# Altium PCB Low Power Brushed Motor Controller.PcbDoc
Units mil, origin at the board's own origin, x right, y up, seen from the top; angles counter-clockwise.
Board outline 3149.61 x 1181.1 mil, 4 copper layers (Top Layer, GND, 12V_FUSED, Bottom Layer), stack 23.756 mil thick; 34 components, 18 nets, 80 pads, 200 vias.
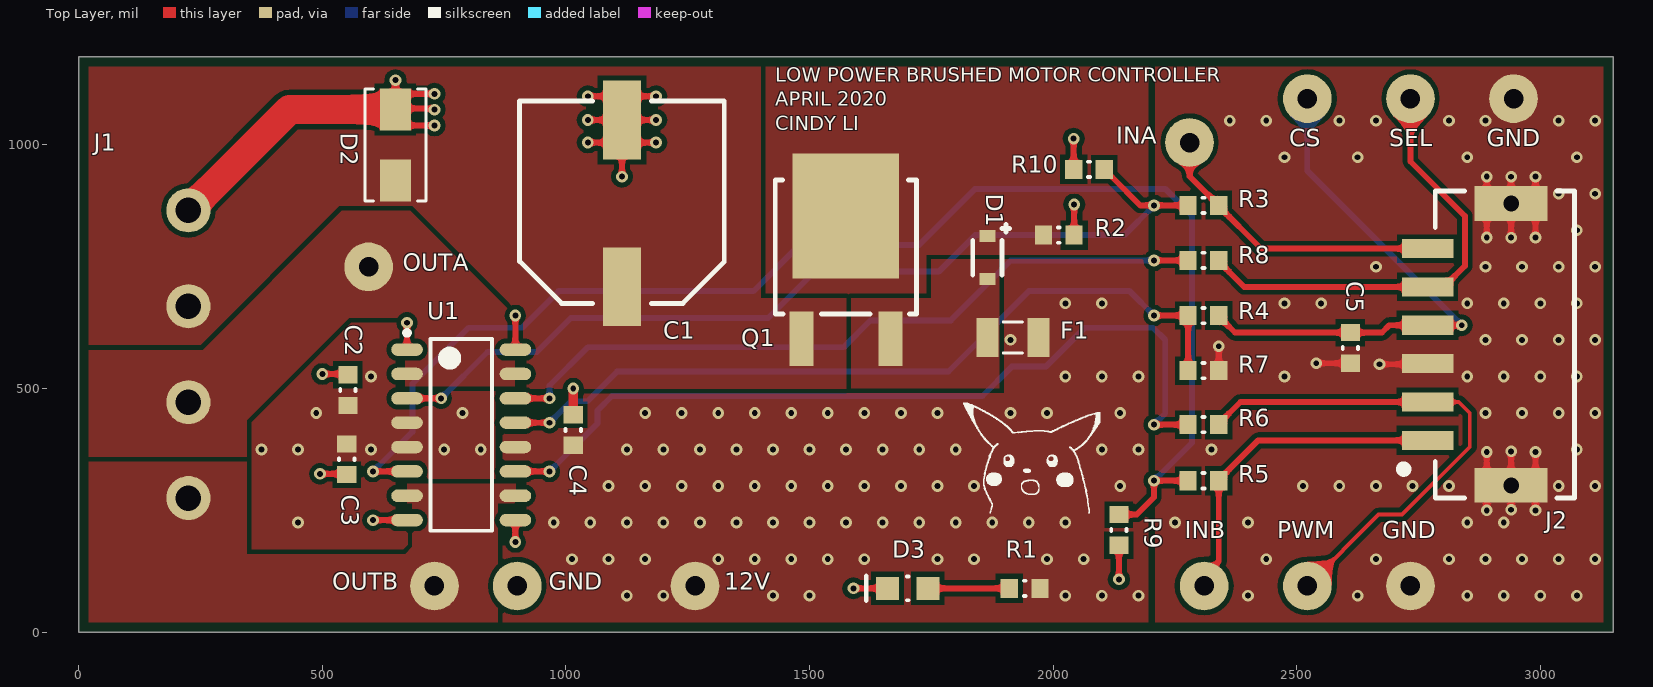
[diagram p0: Top Layer view]
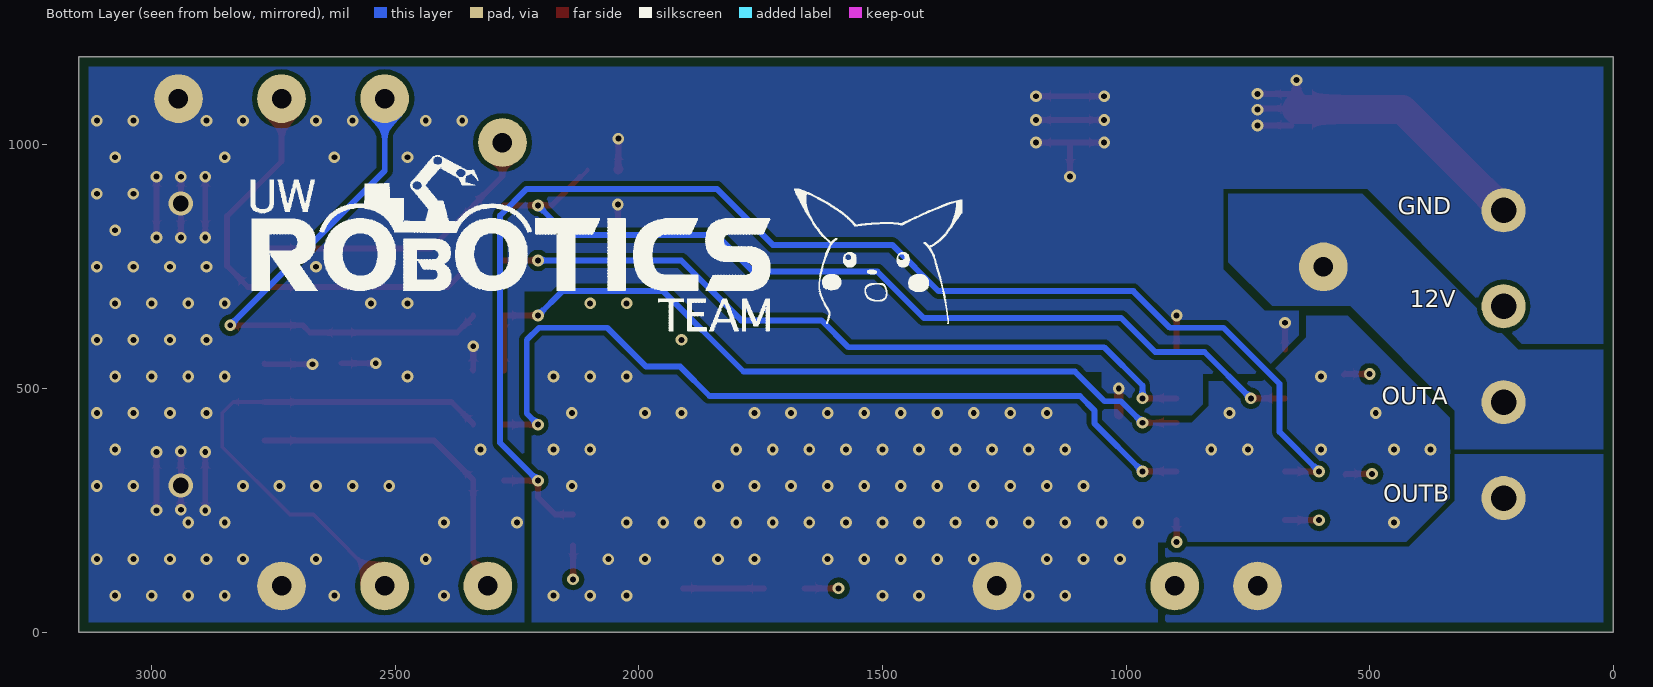
[diagram p1: Bottom Layer view, seen from below]
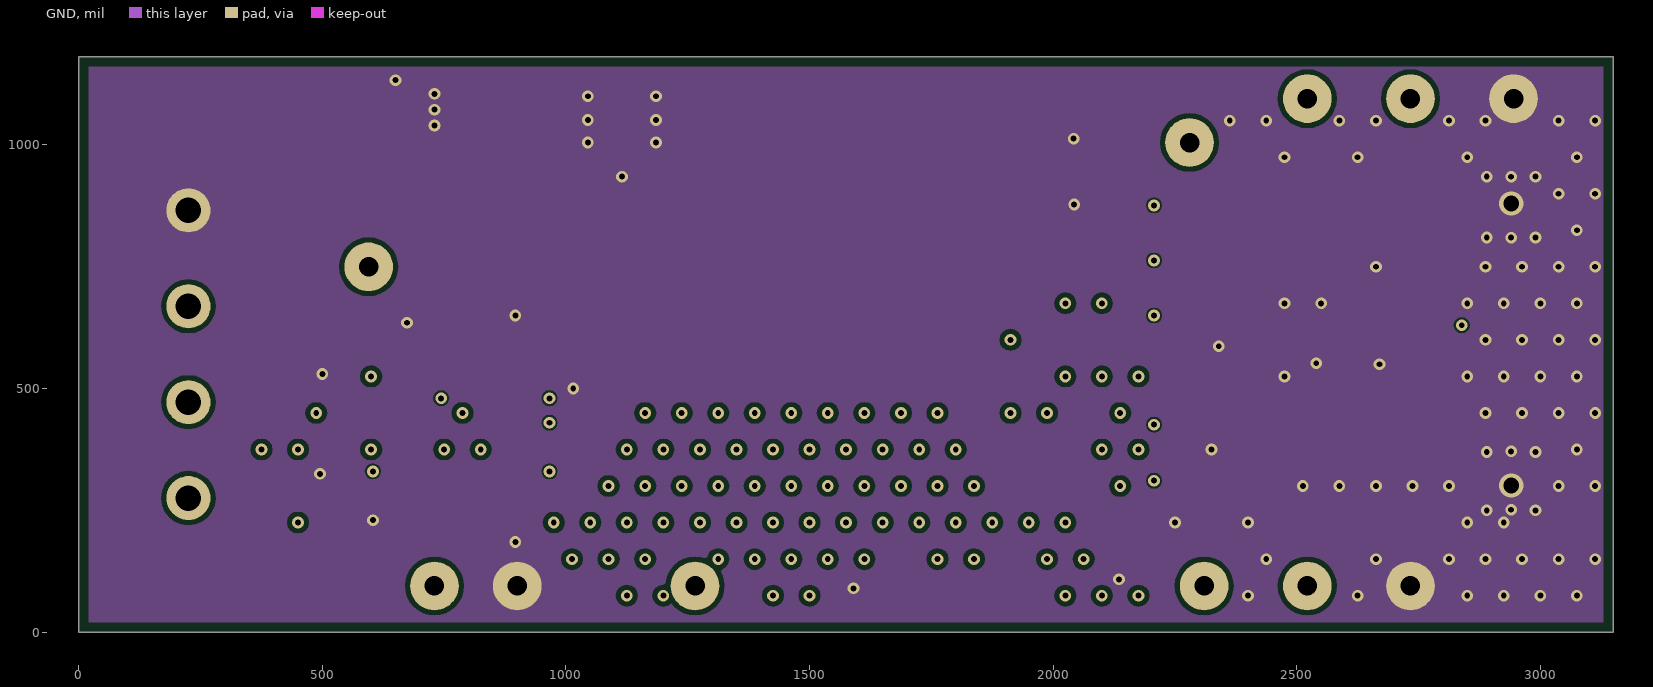
[diagram p2: GND]
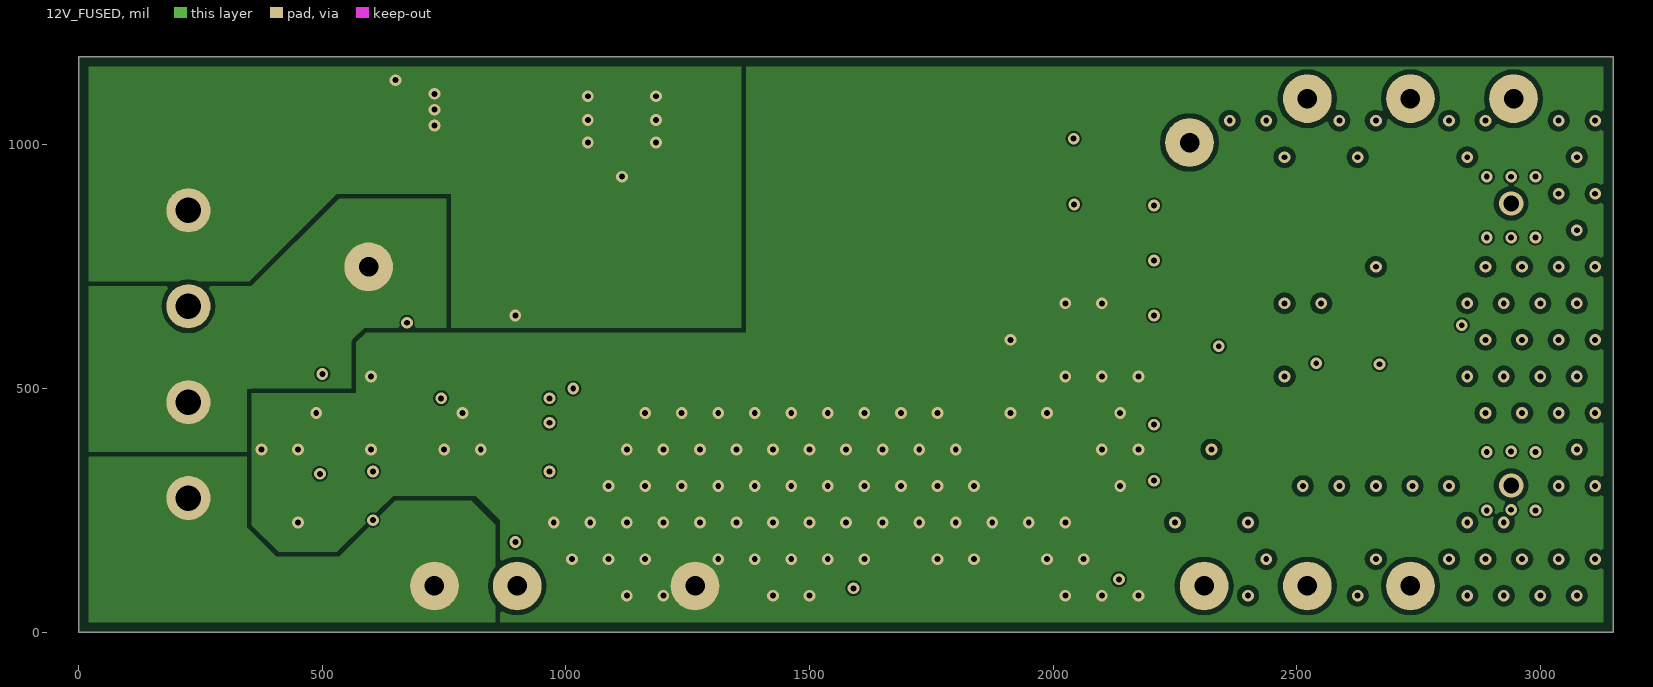
[diagram p3: 12V_FUSED]

## Layer stack, top to bottom
Top Solder: solder mask 0.4, Solder Resist, Dk 3.5
Top Layer: signal copper 1.4
Dielectric 2: prepreg 2.8, PP-006, Dk 4.1
GND: signal copper 1.378
Dielectric 1: dielectric 12.6, FR-4, Dk 4.8
12V_FUSED: signal copper 1.378
Dielectric 3: prepreg 2.8, PP-006, Dk 4.1
Bottom Layer: signal copper 1.4
Bottom Solder: solder mask 0.4, Solder Resist, Dk 3.5

## Board outline
0,1181.1 3149.61,1181.1 3149.61,0 0,0

## Design rules (kind name [scope] priority, off if disabled: settings)
BoardOutlineClearance [All] p1: gap=20 ignorepadtopadclearanceinfootprint=FALSE
Clearance "Clearance Polygons" [InPolygon] p1: gap=10 ignorepadtopadclearanceinfootprint=FALSE except(0: Arc-Hole Track-Hole SMDPad-Hole THPad-Hole Via-Hole Fill-Hole Poly-Hole Region-Hole Text-Hole)
Clearance [All] p2: gap=6 ignorepadtopadclearanceinfootprint=FALSE
ComponentClearance "HM-TRP & UFL" [InComponent('X1') vs InComponent('U1')] p1: gap=0 collisioncheckmode=3 verticalgap=0 showdistances=FALSE
ComponentClearance [All] p2: gap=1 collisioncheckmode=3 verticalgap=1 showdistances=FALSE
DiffPairsRouting [All] p1: maxlimit=393.7 minlimit=5 mostfreqgap=8 toplayer_minwidth=5 toplayer_maxwidth=15 toplayer_prefwidth=8 midlayer1_minwidth=5 midlayer1_maxwidth=15 midlayer1_prefwidth=8 midlayer2_minwidth=5 midlayer2_maxwidth=15 midlayer2_prefwidth=8 bottomlayer_minwidth=5 bottomlayer_maxwidth=15 bottomlayer_prefwidth=8 maxuncoupledlength=500
HoleSize [All] p1: absolutevalues=TRUE maxlimit=265 minlimit=10 maxpercent=80.000 minpercent=20.000
HoleToHoleClearance [All] p1: gap=10 allowstackedmicrovias=FALSE
MinimumAnnularRing [All] p1: minimumring=4
MinimumSolderMaskSliver [All] p1: minsoldermaskwidth=0
PlaneClearance [All] p1: clearance=10
PlaneConnect [All] p1: planeconnectstyle=Relief reliefexpansion=4 reliefentries=4 reliefconductorwidth=6 reliefairgap=6
PolygonConnect GROUND [InNet('GND') vs InNet('GND')] p1: connectstyle=Direct reliefconductorwidth=10 reliefentries=4 polygonreliefangle="90 Angle" airgapwidth=10
PolygonConnect OUTA [InNet('OUTA') vs InNet('OUTA')] p2: connectstyle=Direct reliefconductorwidth=10 reliefentries=4 polygonreliefangle="90 Angle" airgapwidth=10
PolygonConnect OUTB [InNet('OUTB') vs InNet('OUTB')] p3: connectstyle=Direct reliefconductorwidth=10 reliefentries=4 polygonreliefangle="90 Angle" airgapwidth=10
PolygonConnect 12V [InNet('12V') vs InNet('12V')] p4: connectstyle=Direct reliefconductorwidth=20 reliefentries=4 polygonreliefangle="90 Angle" airgapwidth=10
PolygonConnect NetD1_1 [InNet('NetD1_1') vs InNet('NetD1_1')] p5: connectstyle=Direct reliefconductorwidth=20 reliefentries=4 polygonreliefangle="90 Angle" airgapwidth=10
PolygonConnect NetD1_2 [InNet('NetD1_2') vs InNet('NetD1_2')] p6: connectstyle=Direct reliefconductorwidth=20 reliefentries=4 polygonreliefangle="90 Angle" airgapwidth=10
PolygonConnect 12V_FUSED [InNet('12V_FUSED') vs InNet('12V_FUSED')] p7: connectstyle=Direct reliefconductorwidth=20 reliefentries=4 polygonreliefangle="90 Angle" airgapwidth=10
PolygonConnect "Via connect style" [isVia] p8: connectstyle=Relief reliefconductorwidth=10 reliefentries=4 polygonreliefangle="90 Angle" airgapwidth=10
PolygonConnect GENERAL [All] p9: connectstyle=Relief reliefconductorwidth=10 reliefentries=4 polygonreliefangle="90 Angle" airgapwidth=10
RoutingCorners [All] p1: cornerstyle=45-Degree minsetback=49.21 maxsetback=49.21
RoutingVias [All] p1: holewidth=12 width=22 viastyle="Through Hole" minholewidth=10 minwidth=18 maxholewidth=100 maxwidth=114
SilkToSilkClearance [All] p1: silktosilkclearance=0
SilkToSolderMaskClearance [IsPad] p1: minsilkscreentomaskgap=5 clearancetoexposedcopper=TRUE
SolderMaskExpansion [All] p1: expansion=2.5 istentingtop=FALSE
Width GND [InNet('GND')] p1: maxlimit=100 minlimit=10 preferedwidth=20 minimp=50.000000 maximp=50.000000 favimp=50.000000
Width Power [InNetClass('Power')] p2: maxlimit=40 minlimit=20 preferedwidth=30
Width 3V3 [InNetClass('3V3')] p3: maxlimit=30 minlimit=10 preferedwidth=20
Width [All] p4: maxlimit=400 minlimit=6 preferedwidth=8
20 further rules are at their usual default settings.

## Classes and differential pairs
component class "Low Power Brushed Motor Controller": 12V C1 C2 C3 C4 C5 CS D1 D2 D3 F1 GND INA INB J1 J2 OUTA OUTB PWM Q1 R1 R2 R3 R4 R5 R6 R7 R8 R9 R10 SEL U1

## Components (designator, comment, footprint, x,y, rotation, side; value= is the part's Value field where it differs from the comment)
12V "TESTPOINT_LOOP" TESTPOINT_LOOP 1265,95 r0 top (schematic designator TP1)
C1 "CAP_270uF_50V_ALUM" RADIAL_PANASONIC_G 1115,880 r0 top
C2 "CAP_0.1uF_50V_0603" CAPC0603(1608)55_N 552.32,496.87 r270 top value=0.1uF
C3 "CAP_0.1uF_50V_0603" CAPC0603(1608)55_N 550,355 r90 top value=0.1uF
C4 "CAP_0.1uF_50V_0603" CAPC0603(1608)55_N 1015,415 r90 top value=0.1uF
C5 "CAP_10nF_0603" CAPC0603(1608)55_N 2610,583.5 r90 top value=10nF
CS "TESTPOINT_LOOP" TESTPOINT_LOOP 2521.67,1095 r0 top (schematic designator TP4)
D1 "DIO_ZENER_15V" SOD-323_UNIDIR 1865,768.9 r270 top
D2 "TVS_DIODE_BIDIR_12.8V" TVS_DIODE_BIDIR_DO-214AC_SMA 650,1000 r90 top
D3 "DIO_LED_G" LED_0805_LINE 1701.34,90 r180 top
F1 "FUSE_20A_1206" FUSE_1206 1917.5,605 r0 top
GND "TESTPOINT_LOOP" TESTPOINT_LOOP 2945,1095 r180 top (schematic designator TP11)
GND "TESTPOINT_LOOP" TESTPOINT_LOOP 2733.33,95 r180 top (schematic designator TP10)
GND "TESTPOINT_LOOP" TESTPOINT_LOOP 900,95 r180 top (schematic designator TP9)
INA "TESTPOINT_LOOP" TESTPOINT_LOOP 2280,1005 r0 top (schematic designator TP3)
INB "TESTPOINT_LOOP" TESTPOINT_LOOP 2310,95 r0 top (schematic designator TP5)
J1 "CON_4M_TERM" 1935187 225,570.55 r90 top
J2 "CON_6M_SM_RA" MOLEX-5024940670 2854.33,590.55 r90 top
OUTA "TESTPOINT_LOOP" TESTPOINT_LOOP 595,750 r0 top (schematic designator TP6)
OUTB "TESTPOINT_LOOP" TESTPOINT_LOOP 730,95 r0 top (schematic designator TP8)
PWM "TESTPOINT_LOOP" TESTPOINT_LOOP 2521.67,95 r0 top (schematic designator TP7)
Q1 "PMOS_40V_100A" D-PAK 1574.69,728.39 r0 top
R1 "RES_680R_0603" RESC0603(1608)_N 1941.5,90 r0 top
R2 "RES_680R_0603" RESC0603(1608)_N 2011.5,815 r180 top
R3 "RES_680R_0603" RESC0603(1608)_N 2308.5,876 r180 top
R4 "RES_10K_0603" RESC0603(1608)_N 2308.5,650 r0 top value=10K
R5 "RES_680R_0603" RESC0603(1608)_N 2308.5,311 r180 top
R6 "RES_680R_0603" RESC0603(1608)_N 2308.5,426 r180 top
R7 "RES_680R_0603" RESC0603(1608)_N 2308.5,537 r180 top
R8 "RES_680R_0603" RESC0603(1608)_N 2308.5,763 r180 top
R9 "RES_10K_0603" RESC0603(1608)_N 2135,210 r90 top value=10K
R10 "RES_10K_0603" RESC0603(1608)_N 2073.5,950 r0 top value=10K
SEL "TESTPOINT_LOOP" TESTPOINT_LOOP 2733.33,1095 r0 top (schematic designator TP2)
U1 "IC_MOTOR_DRIVER_ST" SO-16N 785,405 r0 top

## Footprints (in the part's own frame and the unit in brackets; to place one, negate y for a bottom-side part, rotate by r counter-clockwise, add the part's x,y. Pads: shape width x height; smd on the part's side, far side on the other; paste and mask are expansions set on the pad)
1935187 [mm]
  round 2.3 hole 1.325: 1(-7.5,0) 2(-2.5,0) 3(2.5,0) 4(7.5,0)
  body extent -10.79,-4.06 9.78,4.94, height 11.41
CAPC0603(1608)55_N [mm] "Chip Capacitor, Body 1.6x0.8mm, Height 0.55mm, IPC Medium Density"
  rect 0.9x1 smd: 1(-0.8,0) 2(0.8,0)
  silkscreen extent -0.05,-0.4 0.05,0.4, body extent -0.87,-0.48 0.88,0.47, height 0.55
D-PAK [mm] "TO-252AA"
  rect 5.55x6.5 smd: 1(0,3.2)
  rect 1.25x2.85 smd: 2(-2.325,-3.2) 3(2.325,-3.2)
  silkscreen extent -3.68,-1.91 3.68,5.08, body extent -3.27,-4.08 3.27,5.8, height 2.64
FUSE_1206 [mil]
  rect 45x80 smd mask+1: 1(-52.5,0) 2(52.5,0)
  silkscreen extent -20,-32 20,32, body extent -65,-32 65,32, height 32
LED_0805_LINE [mm] "SMD, 2-Leads, Body 2x1.25mm"
  rect 1.2x1.2 smd: 1(-1.05,0) 2(1.05,0)
  silkscreen extent -0.05,-0.63 2.16,0.64, body extent -1,-0.63 1,0.63, height 0.8
MOLEX-5024940670 [mm] "Molex 5024940670 6 pin 2mm pitch SMD RA connector"
  rect 1.8x3.8 smd: 0(-7.35,-2.175) 0(7.35,-2.175)
  rect 1x2.7 smd: 1(-5,2.175) 2(-3,2.175) 3(-1,2.175) 4(1,2.175) 5(3,2.175) 6(5,2.175)
  silkscreen extent -8,-5.49 8,3.62, body extent -8,-5.49 8,3.01, height 6.91
RADIAL_PANASONIC_G [mm] "Size G radial surface mount capacitor"
  rect 2x4.1 smd: 1(0,-4.35) 2(0,4.35)
  silkscreen extent -5.33,-5.21 5.33,5.33, body extent -5.15,-5.8 5.15,5.8, height 10.21
RESC0603(1608)_N [mm] "Chip Resistor, Body 1.6x0.8mm, IPC Medium Density"
  rect 0.9x1 smd: 1(-0.8,0) 2(0.8,0)
  silkscreen extent -0.05,-0.4 0.05,0.4, body extent -0.85,-0.47 0.85,0.47, height 0.6
SO-16N [mm]
  oval 1.65x0.65 smd: 1(-2.825,4.445) 2(-2.825,3.175) 3(-2.825,1.905) 4(-2.825,0.635) 5(-2.825,-0.635) 6(-2.825,-1.905) 7(-2.825,-3.175) 8(-2.825,-4.445) 9(2.825,-4.445) 10(2.825,-3.175) 11(2.825,-1.905) 12(2.825,-0.635) 13(2.825,0.635) 14(2.825,1.905) 15(2.825,3.175) 16(2.825,4.445)
  silkscreen extent -2.95,-5 1.6,5.44, body extent -3,-5 3,5, height 1.75
SOD-323_UNIDIR [mm]
  rect 0.63x0.83 smd: 1(-1.115,0) 2(1.115,0)
  silkscreen extent -1.73,-0.76 0.9,1.17, body extent -1.24,-0.62 1.24,0.62, height 1.1
TESTPOINT_LOOP [mm]
  round 2.54 hole 1.02: 1(0,0)
  body extent -1.27,-1.27 1.27,1.27, height 4.57
TVS_DIODE_BIDIR_DO-214AC_SMA [mm]
  rect 2.18x1.63 smd: 1(-1.857,0) 2(1.857,0)
  silkscreen extent -2.92,-1.59 2.92,1.59, body extent -2.6,-1.3 2.6,1.3, height 2.38

## Part data
12V CS GND GND GND INA INB OUTA OUTB PWM SEL: "Loop testpoint through-hole pad", Manufacturer="Keystone Electronics", Manufacturer Part Number 1=5002, Supplier Part Number 1=36-5002-ND, Supplier 1=Digi-Key
C1: "CAP ALUM 270UF 20% 50V RADIAL", Capacitance=270uF, Case/Package=Radial, ESR (Equivalent Series Resistance)=180mR, Manufacturer 1=Panasonic, Manufacturer Part Number 1=EEEFK1H271SP, Max Operating Temperature=105°C, Min Operating Temperature=-55°C, Package Quantity=500, Ripple Current=435.5mA, Ripple Current (AC)=670mA, Supplier Part Number 1=P18967CT-ND, Tolerance=20%, Voltage Rating=50V, ComponentLink1Description=https://media.digikey.com/pdf/Data%20Sheets/Panasonic%20Capacitors%20PDFs/FKS_Series_Type_V.pdf?src-supplier=Digi-Key, ComponentLink1URL=https://media.digikey.com/pdf/Data%20Sheets/Panasonic%20Capacitors%20PDFs/FKS_Series_Type_V.pdf?src-supplier=Digi-Key, ComponentLink2Description=https://media.digikey.com/pdf/Data%20Sheets/Panasonic%20Capacitors%20PDFs/FKS-V_Series_NPI.pdf?src-supplier=Digi-Key, ComponentLink2URL=https://media.digikey.com/pdf/Data%20Sheets/Panasonic%20Capacitors%20PDFs/FKS-V_Series_NPI.pdf?src-supplier=Digi-Key, ComponentLink3Description=http://www.farnell.com/datasheets/2813662.pdf?src-supplier=Farnell, ComponentLink3URL=http://www.farnell.com/datasheets/2813662.pdf?src-supplier=Farnell, ComponentLink4Description=http://www.farnell.com/datasheets/1996420.pdf?src-supplier=Element14, ComponentLink4URL=http://www.farnell.com/datasheets/1996420.pdf?src-supplier=Element14, ComponentLink5Description=https://industrial.panasonic.com/cdbs/www-data/pdf/RDE0000/DME0000COL90.pdf?src-supplier=Digi-Key, ComponentLink5URL=https://industrial.panasonic.com/cdbs/www-data/pdf/RDE0000/DME0000COL90.pdf?src-supplier=Digi-Key, Diameter=10mm, Height=10.2mm, Height - Seated (Max)=0.413inch, Life (Hours)=2000Hour, Mount="Surface Mount", Packaging="Cut Tape", Polarity=Polar, Pricing 1="1=0.98000, 10=0.74800, 100=0.53500 (USD)", REACH SVHC=Unknown, RoHS=Yes, Stock 1=730, Supplier 1=Digi-Key, Voltage Rating (DC)=50V
C2 C3 C4: "CAP CER 0.1UF 50V X7R 0603", Manufacturer 1=Yageo, Manufacturer Part Number 1=CC0603KRX7R9BB104, Package="0603 (1608 Metric)", Supplier Part Number 1=311-1344-1-ND, Temperature Coefficient=X7R, Voltage Rating=50V, Dimensions="0.063\" L x 0.031\" W (1.60mm x 0.80mm)", Mount="Surface Mount", Supplier 1=Digi-Key
C5: "CAP CER 10000PF 16V X7R 0603", Manufacturer 1=Yageo, Manufacturer Part Number 1=CC0603KRX7R7BB103, Package="0603 (1608 Metric)", Supplier Part Number 1=311-3369-1-ND, Temperature Coefficient=X7R, Voltage Rating=16V, Dimensions="0.063\" L x 0.031\" W (1.60mm x 0.80mm)", Mount="Surface Mount", Supplier 1=Digi-Key
D1: "DIODE ZENER 15V 300mW SMD SOD-323", Breakdown Voltage=15.8V, Case/Package=SOD-323-2, Forward Voltage=900mV, Manufacturer 1="ON Semiconductor", Manufacturer Part Number 1=MM3Z15VT1G, Max Operating Temperature=150°C, Max Power Dissipation=200mW, Max Reverse Leakage Current=50nA, Min Operating Temperature=-65°C, Package Quantity=3000, Supplier Part Number 1=MM3Z15VT1GOSCT-ND, Test Current=5mA, Tolerance=5%, Voltage Rating (DC)=15V, Zener Current=10mA, ComponentLink1Description=Datasheet, ComponentLink1URL=https://media.digikey.com/pdf/Data%20Sheets/ON%20Semiconductor%20PDFs/MM3ZyyyT1G_SZMM3ZyyyT1G_Series_rev.11_Sep2014.pdf, Contact Plating=Tin,Matte, Element Configuration=Single, ESD Protection=Yes, Height=1mm, Impedance=30R, Lead Free="Lead Free", Length=1.8mm, Material=Plastic, Number of Pins=2, Packaging="Tape and Reel", Peak Reverse Current=50nA, Power Dissipation=200mW, Power Rating=200mW, Pricing 1="1=0.14000, 10=0.13000, 25=0.12360, 100=0.05450, 250=0.05228, 500=0.04276, 1000=0.02970 (USD)", Radiation Hardening=No, REACH SVHC="No SVHC", RoHS=Yes, Stock 1=57465, Supplier 1=Digi-Key, Voltage Tolerance=5%, Width=1.35mm, Working Voltage=15V, Zener Voltage=15V
D2: "TVS DIODE 12.8V 21.2V SMA", Breakdown Voltage=15.8V, Case/Package=SMA, Clamping Voltage=21.2V, Leakage Current=1uA, Manufacturer 1="Vishay Semiconductors", Manufacturer Part Number 1=P4SMA15CA-E3/61, Max Operating Temperature=150°C, Max Surge Current=18.9A, Min Breakdown Voltage=14.3V, Min Operating Temperature=-65°C, Operating Supply Voltage=12.8V, Package Quantity=1800, Peak Pulse Power=400W, Power Line Protection=No, Supplier Part Number 1=P4SMA15CA-E3/61GICT-ND, Test Current=1mA, ComponentLink1Description=https://datasheet.ciiva.com/344/p4sma-344213.pdf?src-supplier=Digi-Key, ComponentLink1URL=https://datasheet.ciiva.com/344/p4sma-344213.pdf?src-supplier=Digi-Key, ComponentLink2Description=https://datasheet.ciiva.com/26212/p4sma-26212614.pdf?src-supplier=Avnet+Europe, ComponentLink2URL=https://datasheet.ciiva.com/26212/p4sma-26212614.pdf?src-supplier=Avnet+Europe, Composition=Zener, Direction=Bidirectional, Element Configuration=Single, Max Reverse Leakage Current=1uA, Mount="Surface Mount", Number of Bidirectional Channels=1, Number of Channels=1, Number of Elements=1, Number of Pins=2, Packaging="Tape and Reel", Peak Pulse Current=18.9A, Polarity=Bidirectional, Pricing 1="1=0.38000, 10=0.31000, 25=0.28400, 100=0.17820, 250=0.17624, 500=0.16500 (USD)", Radiation Hardening=No, Reverse Breakdown Voltage=14.3V, Reverse Standoff Voltage=12.8V, RoHS=Yes, Stock 1=5900, Supplier 1=Digi-Key, Termination=SMD/SMT
D3: "LED GREEN DIFFUSED 0805 SMD", Forward Voltage Drop=2.2V, Manufacturer=OSRAM, MPN="LG R971-KN-1", Package="0805 (2012 Metric)", Supplier Part Number 1=475-1410-1-ND, Supplier 1=Digi-Key
F1: Case Code (Imperial)=1206, Case Code (Metric)=3216, Current Rating=20A, DC Cold Resistance=2mR, Manufacturer 1=Littelfuse, Manufacturer Part Number 1=0501020.WR, Max Operating Temperature=150°C, Min Operating Temperature=-55°C, Package Quantity=3000, Power Dissipation=1.1871W, Supplier Part Number 1=F2920CT-ND, Voltage Rating=32V, Voltage Rating (DC)=24V, Approvals=UL,CSA, Body Material=Ceramic, Case/Package=1206, ComponentLink1Description=https://datasheet.ciiva.com/3813/2da-3813990.pdf?src-supplier=Arrow, ComponentLink1URL=https://datasheet.ciiva.com/3813/2da-3813990.pdf?src-supplier=Arrow, ComponentLink2Description=https://datasheet.ciiva.com/1730/714013-1730635.pdf?src-supplier=Newark, ComponentLink2URL=https://datasheet.ciiva.com/1730/714013-1730635.pdf?src-supplier=Newark, ComponentLink3Description=https://datasheet.ciiva.com/46394/714013-46394876.pdf?src-supplier=Element14, ComponentLink3URL=https://datasheet.ciiva.com/46394/714013-46394876.pdf?src-supplier=Element14, ComponentLink4Description=https://datasheet.ciiva.com/299/littelfuse-fuse-501-series-299426.pdf?src-supplier=Digi-Key, ComponentLink4URL=https://datasheet.ciiva.com/299/littelfuse-fuse-501-series-299426.pdf?src-supplier=Digi-Key, ComponentLink5Description=https://datasheet.ciiva.com/299/littelfuse-fuse-501-series-299427.pdf?src-supplier=Digi-Key, ComponentLink5URL=https://datasheet.ciiva.com/299/littelfuse-fuse-501-series-299427.pdf?src-supplier=Digi-Key, ComponentLink6Description=https://datasheet.ciiva.com/299/littelfuse-fuse-501-series-299428.pdf?src-supplier=Digi-Key, ComponentLink6URL=https://datasheet.ciiva.com/299/littelfuse-fuse-501-series-299428.pdf?src-supplier=Digi-Key, Depth=1.63mm, Fuse Current=20A, Fuse Type="Board Mount (Cartridge Style Excluded)", Height=0.033inch, Housing Material=Ceramic, Lead Free="Lead Free", Length=3.2mm, Mount="Surface Mount", Packaging="Tape and Reel", Pricing 1="1=0.96000, 5=0.93000, 10=0.87100, 50=0.72080, 100=0.60060, 250=0.58560, 500=0.49550, 1000=0.43544 (USD)", REACH SVHC="No SVHC", Resistance=2mR, RoHS=Yes, Stock 1=4551, Supplier 1=Digi-Key, Termination=SMD/SMT, Width=0.064inch, Working Voltage=24V
J1: "TERM BLK 4POS SIDE ENTRY 5MM PCB", Current=18A, Manufacturer 1="Phoenix Contact", Manufacturer Part Number 1=1935187, Supplier Part Number 1=277-1579-ND, Voltage=300V, Mounting Type="Through Hole", Pitch=5mm, Screw Thread=M2.6, Supplier 1=Digi-Key, Wire Gauge=12-26AWG, Wire Termination=Screw
J2: "CONN HEADER SMD RIGHT ANGLE 2MM PITCH", Color=Natural, Current Rating=3A, Flammability Rating="UL94 V-0", Insulation Resistance=1GR, Manufacturer 1=Molex, Manufacturer Part Number 1=502494-0670, Max Operating Temperature=85°C, Max Voltage Rating (AC)=250V, Min Operating Temperature=-25°C, Package Quantity=950, Supplier Part Number 1=WM2283CT-ND, ComponentLink1Description=https://datasheet.ciiva.com/755/5024940670-sd-755844.pdf?src-supplier=Digi-Key, ComponentLink1URL=https://datasheet.ciiva.com/755/5024940670-sd-755844.pdf?src-supplier=Digi-Key, ComponentLink2Description=https://datasheet.ciiva.com/24467/101355024940670-pcb-receptacles-24467588.pdf?src-supplier=Onlinecomponents.com, ComponentLink2URL=https://datasheet.ciiva.com/24467/101355024940670-pcb-receptacles-24467588.pdf?src-supplier=Onlinecomponents.com, ComponentLink3Description=https://datasheet.ciiva.com/16656/5024940670-pcb-receptacles-16656439.pdf?src-supplier=Avnet+Europe, ComponentLink3URL=https://datasheet.ciiva.com/16656/5024940670-pcb-receptacles-16656439.pdf?src-supplier=Avnet+Europe, ComponentLink4Description=https://datasheet.ciiva.com/7436/1630854-7436283.pdf?src-supplier=Newark, ComponentLink4URL=https://datasheet.ciiva.com/7436/1630854-7436283.pdf?src-supplier=Newark, ComponentLink5Description=https://datasheet.ciiva.com/5157/5024940670-pcb-receptacles-179322-5157180.pdf?src-supplier=Mouser, ComponentLink5URL=https://datasheet.ciiva.com/5157/5024940670-pcb-receptacles-179322-5157180.pdf?src-supplier=Mouser, ComponentLink6Description=https://datasheet.ciiva.com/7917/1630854-7917014.pdf?src-supplier=Element14, ComponentLink6URL=https://datasheet.ciiva.com/7917/1630854-7917014.pdf?src-supplier=Element14, ComponentLink7Description=https://datasheet.ciiva.com/30242/101355024940670-pcb-receptacles-30242550.pdf?src-supplier=Onlinecomponents.com, ComponentLink7URL=https://datasheet.ciiva.com/30242/101355024940670-pcb-receptacles-30242550.pdf?src-supplier=Onlinecomponents.com, ComponentLink8Description=https://datasheet.ciiva.com/755/5024940670-sd-755789.pdf?src-supplier=Digi-Key, ComponentLink8URL=https://datasheet.ciiva.com/755/5024940670-sd-755789.pdf?src-supplier=Digi-Key, Connector Type=Receptacle,Forked, Contact Gender=Female, Contact Material="Copper Alloy", Contact Plating=Tin, Depth=6.85mm, Fastening Type=Latch, Gender=Receptacle, Glow Wire Compliant=Non-compliant, Housing Color=Natural, Housing Material=PBT, Length=16mm, Material=Polybutylene, Max Voltage Rating (DC)=250V, Mount="Surface Mount", Number of Circuits=6, Number of Contacts=6, Number of Positions=6, Number of Rows=1, Orientation="Right Angle", Packaging="Tape and Reel", Pitch=2mm, Pricing 1="1=0.81000, 10=0.70800, 25=0.66680, 50=0.63880, 100=0.61110, 250=0.55552 (USD)", Radiation Hardening=No, REACH SVHC=Unknown, RoHS=Yes, Stock 1=7093, Supplier 1=Digi-Key, Termination=Solder, Voltage Rating=250V
Q1: "MOSFET P-CH 40V 100A D-PAK 4.4MOHM", Manufacturer 1="ON Semiconductor", Manufacturer Part Number 1=FDD9507L-F085, Power Dissipation (Max)=227W, Supplier Device Package="D-PAK (TO-252)", Supplier Part Number 1=FDD9507L-F085OSCT-ND, FET Type=P-Channel, Id=100A, Supplier 1=Digi-Key, Vdss=40V, Vgs (Max)=16V
R1 R2 R3 R5 R6 R7 R8: "RES SMD 680 OHM 5% 0.1W 0603", Case Code (Imperial)=0603, Case Code (Metric)=1608, Manufacturer 1=Yageo, Manufacturer Part Number 1=AC0603JR-07680RL, Max Operating Temperature=155°C, Max Power Dissipation=100mW, Min Operating Temperature=-55°C, Package Quantity=1, Resistance=680R, Supplier Part Number 1=311-680LECT-ND, Temperature Coefficient=100ppm/°C, Tolerance=5%, Voltage Rating=50V, Case/Package=0603, ComponentLink1Description=http://www.yageo.com/documents/recent/PYu-AC_51_RoHS_L_2.pdf?src-supplier=Mouser, ComponentLink1URL=http://www.yageo.com/documents/recent/PYu-AC_51_RoHS_L_2.pdf?src-supplier=Mouser, ComponentLink2Description=http://www.yageo.com/documents/recent/PYu-AC_51_RoHS_L_2_revised.pdf?src-supplier=Avnet+Europe, ComponentLink2URL=http://www.yageo.com/documents/recent/PYu-AC_51_RoHS_L_2_revised.pdf?src-supplier=Avnet+Europe, ComponentLink3Description=http://www.yageo.com/NewPortal/yageodocoutput?fileName=/pdf/R-Chip/PYu-AC_51_RoHS_L_6.pdf&src-supplier=Digi-Key, ComponentLink3URL=http://www.yageo.com/NewPortal/yageodocoutput?fileName=/pdf/R-Chip/PYu-AC_51_RoHS_L_6.pdf&src-supplier=Digi-Key, Composition="Thick Film", Contact Plating=Tin,Matte, Features="Moisture Resistant,Automotive AEC-Q200,Anti-Sulfur", Height=0.022inch, Lead Free="Lead Free", Length=0.063inch, Number of Terminations=2, Packaging="Tape and Reel", Power Rating=100mW, Pricing 1="1=0.10000, 10=0.02300, 100=0.00940, 1000=0.00421, 2500=0.00366 (USD)", Radiation Hardening=No, RoHS=Yes, Stock 1=4680, Supplier 1=Digi-Key, Termination=SMD/SMT, Width=0.8mm
R4 R9 R10: "RES SMD 10K OHM 5% 1/10W 0603", Manufacturer 1=Yageo, Manufacturer Part Number 1=RC0603JR-0710KL, Package="0603 (1608 Metric)", Supplier Part Number 1=311-10KGRCT-ND, Tolerance=5%, Dimensions="0.063\" L x 0.031\" W (1.60mm x 0.80mm)", Mount="Surface Mount", Supplier 1=Digi-Key
U1: "IC H-BRIDGE MOTOR DRIVER 16-PINS STMicroelectronics VNH7070ASTR, SOIC", Case/Package=SOIC, Manufacturer 1=STMicroelectronics, Manufacturer Part Number 1=VNH7070ASTR, Max Operating Temperature=150°C, Min Operating Temperature=-40°C, Output Current=15A, Supplier Part Number 1=497-17630-1-ND, ComponentLink1Description=http://www.farnell.com/datasheets/2367755.pdf?src-supplier=Farnell, ComponentLink1URL=http://www.farnell.com/datasheets/2367755.pdf?src-supplier=Farnell, ComponentLink2Description=http://www.mouser.com/ds/2/389/vnh7070as-957633.pdf?src-supplier=Mouser, ComponentLink2URL=http://www.mouser.com/ds/2/389/vnh7070as-957633.pdf?src-supplier=Mouser, ComponentLink3Description=http://www.st.com/content/ccc/resource/sales_and_marketing/promotional_material/flyer/5d/08/7a/88/37/7b/43/7d/flm07hbrid.pdf/files/flm07hbrid.pdf/jcr:content/translations/en.flm07hbrid.pdf?src-supplier=Digi-Key, ComponentLink3URL=http://www.st.com/content/ccc/resource/sales_and_marketing/promotional_material/flyer/5d/08/7a/88/37/7b/43/7d/flm07hbrid.pdf/files/flm07hbrid.pdf/jcr:content/translations/en.flm07hbrid.pdf?src-supplier=Digi-Key, Interface=PWM, Lead Free="Lead Free", Logic Function=AND, Mount="Surface Mount", Number of Pins=16, Packaging="Tape and Reel", Pricing 1="1=3.49000, 10=3.13200, 25=2.96120, 100=2.43460, 250=2.18456, 500=2.10560, 1000=1.75028 (USD)", RoHS=No, Stock 1=2116, Supplier 1=Digi-Key

## Via types
v1: diameter 24, hole 12, Top Layer to Bottom Layer, 150 vias
v2: diameter 24, hole 12, Top Layer to Bottom Layer, tented both sides, 48 vias
v3: diameter 50, hole 32, Top Layer to Bottom Layer, 2 vias

## Nets (pads, with @x,y where several pads share a name; then routed paths per layer and width w, separated by ;. In a path a pad name is that pad's centre, name@x,y a point inside that pad or via, vN(x,y) a via of type N, cw(c..) or ccw(c..) an arc to the next point about the centre after c; other vN are vias at no path point)
12V: C1.1 D2.1 J1.3 Q1.2
12V_FUSED: 12V.1 C2.2 C3.2 C4.1 F1.2 R1.2 U1.4 U1.5 U1.12
  other v1: 1125,75 1200,75 1425,75 1500,75 2025,75 2100,75 2175,75 1012.5,150 1087.5,150 1162.5,150 1312.5,150 1387.5,150 1462.5,150 1537.5,150 1612.5,150 1762.5,150 1837.5,150 1987.5,150 2062.5,150 450,225 975,225 1050,225 1125,225 1200,225 1275,225 1350,225 1425,225 1500,225 1575,225 1650,225 1725,225 1800,225 1875,225 1950,225 2025,225 1087.5,300 1162.5,300 1237.5,300 1312.5,300 1387.5,300 1462.5,300 1537.5,300 1612.5,300 1687.5,300 1762.5,300 1837.5,300 2137.5,300 375,375 450,375 600,375 750,375 825,375 1125,375 1200,375 1275,375 1350,375 1425,375 1500,375 1575,375 1650,375 1725,375 1800,375 2100,375 2175,375 487.5,450 787.5,450 1162.5,450 1237.5,450 1312.5,450 1387.5,450 1462.5,450 1537.5,450 1612.5,450 1687.5,450 1762.5,450 1912.5,450 1987.5,450 2137.5,450 600,525 2025,525 2100,525 2175,525 1912.5,600 2025,675 2100,675
CURRENT_SENSE: C5.2 CS.1 J2.4 R4.2 | length 1116.9
  Top Layer w12: R4.2 2340,648.03 2373.03,615 C5.2 2675,615 2690,630 J2.4@2768.62,630 ; J2.4 J2.4@2768.62,630 ; v2(2838.62,630) J2.4@2768.62,630
  Bottom Layer w12: CS.1 2521.67,946.96 v2(2838.62,630)
GND: C1.2 C2.1 C3.1 C4.2 C5.1 D2.2 D3.2 GND.1 J1.4 J2.0 J2.3 R2.1 R7.1 R9.1 R10.1 U1.1 U1.8 U1.9 U1.16 | length 2901.8
  Top Layer w12: v2(495,325) 548.5,325 C3.1 ; v2(500,530) 550.69,530 C2.1@551.16,529.53 ; C2.1@550,530.69 C2.1@551.16,529.53 ; C2.1 C2.1@551.16,529.53 ; v2(603.78,230) U1.8 ; D2.2 v2(650,1133.12) ; D2.2@660,1040 v2(730,1040) ; D2.2@660,1075 v2@730,1075 ; D2.2@660,1105 v2(730,1105) ; U1.1 v2(673.78,635) ; v2(896.22,185) U1.9 ; U1.16 v2(896.22,650) ; v2(1045,1005) C1.2@1115,1005 ; v2(1045,1051.26) C1.2 v2(1185,1051.26) ; v2(1045,1100) v2(1185,1100) ; v2(1115,935) C1.2@1115,1005 ; v2(1185,1005) C1.2@1115,1005 ; v2(1590,90) D3.2 ; R10.1 v2(2042.01,1013) ; R2.1 v2(2042.99,878) ; v2(2135,108.5) R9.1 ; R7.1@2342,539 R7.1 v2(2340,586.92) v2@2342,588.92 ; v2(2540,552.01) C5.1 ; v2(2670,550) 2767.52,550 J2.3 ; v2(2890,250) v2(2890,370) ; v2(2890,810) v2(2890,935) ; v2(2939.96,251.18) v3(2939.96,301.18) v2(2939.96,371.18) ; v2(2939.96,809.92) v3(2939.96,879.92) v2(2939.96,934.92) ; v2(2990,250) v2(2990,370) ; v2(2990,810) v2(2990,935)
  Top Layer w20: C4.2 v2(1015,500) ; R10.1 R10.1@2042.5,949.51 ; v2@2042.5,878.49 v2(2042.99,878)
  Top Layer w60: J1.4 432.29,1073.12 D2.2
  other v1: 2400,75 2625,75 2850,75 2925,75 3000,75 3075,75 2437.5,150 2662.5,150 2812.5,150 2887.5,150 2962.5,150 3037.5,150 3112.5,150 2250,225 2400,225 2850,225 2925,225 2512.5,300 2587.5,300 2662.5,300 2737.5,300 2812.5,300 3037.5,300 3112.5,300 2325,375 3075,375 2887.5,450 2962.5,450 3037.5,450 3112.5,450 2475,525 2850,525 2925,525 3000,525 3075,525 2887.5,600 2962.5,600 3037.5,600 3112.5,600 2475,675 2550,675 2850,675 2925,675 3000,675 3075,675 2662.5,750 2887.5,750 2962.5,750 3037.5,750 3112.5,750 3075,825 3037.5,900 3112.5,900 2475,975 2625,975 2850,975 3075,975 2362.5,1050 2437.5,1050 2587.5,1050 2662.5,1050 2812.5,1050 2887.5,1050 3037.5,1050 3112.5,1050
  other v2: 730,1072.5
INA: R3.2 R10.2 U1.3 | length 1901.1
  Top Layer w8: R10.2 2105,948.03 2118.72,934.31 R10.2@2120.69,934.31
  Top Layer w12: U1.3 v2(743.78,480) ; R10.2@2120.69,934.31 2179,876 v2(2207.01,876) R3.2
  Bottom Layer w12: v2(743.78,480) 838.78,575 940,575 1010,645 1415,645 1510,740 1765,740 1840,815 2146.01,815 v2(2207.01,876)
INA_R: INA.1 J2.6 R3.1 | length 619.8
  Top Layer w12: INA.1 2280,936 2327.27,888.73 R3.1 ; R3.1@2339.02,875.02 2426.63,787.4 J2.6
INB: R5.2 R9.2 U1.6 | length 2839.1
  Top Layer w12: v2(603.78,330) U1.6 ; R9.2 2171.5,241.5 2207.01,277.01 v2(2207.01,311) R5.2
  Bottom Layer w12: v2(603.78,330) 685,411.22 685,510 800,625 910,625 985,700 1385,700 1480,795 1725,795 1840,910 2230,910 2285,855 2285,388.99 v2(2207.01,311)
INB_R: INB.1 J2.1 R5.1 | length 692.5
  Top Layer w12: INB.1 2310,115.69 2340,145.69 2340,312.97 2420.73,393.7 J2.1
NetD1_1: D1.1 Q1.1 R2.2
NetD1_2: D1.2 F1.1 Q1.3
NetD3_1: D3.1 R1.1 | length 167.3
  Top Layer w12: D3.1 R1.1
NetR4_1: R4.1 R7.2 U1.13 | length 1626.3
  Top Layer w12: U1.13 v2(966.22,430) ; v2(2207.01,650) R4.1 R7.2
  Bottom Layer w12: v2(966.22,430) 1010.25,474.03 1044.03,474.03 1105,535 1785,535 1950,700 2157.01,700 v2(2207.01,650)
OUTA: J1.2 OUTA.1 U1.2 U1.15
OUTB: J1.1 OUTB.1 U1.7 U1.10
PWM: R6.2 U1.11 | length 1735.4
  Top Layer w12: U1.11 v2(966.22,330) ; v2(2207.01,426) R6.2
  Bottom Layer w12: v2(966.22,330) 1065,428.78 1065,455.31 1094.69,485 1855,485 1915,545 1985,545 2065,625 2205,625 2230,600 2230,448.99 v2(2207.01,426)
PWM_R: J2.2 PWM.1 R6.1 | length 1066.1
  Top Layer w8: PWM.1 2667.91,241.24 2716.24,241.24 2855,380 2855,450 2832.56,472.44 J2.2
  Top Layer w12: R6.1 2340,427.97 2384.47,472.44 J2.2
SEL0: R8.2 U1.14 | length 1513.4
  Top Layer w12: U1.14 v2(966.22,480) ; v2(2207.01,763) R8.2
  Bottom Layer w12: v2(966.22,480) 966.22,506.22 1045,585 1570,585 1625,640 1790,640 1913,763 v2(2207.01,763)
SEL0_R: J2.5 R8.1 SEL.1 | length 936.2
  Top Layer w12: R8.1 2340,761.03 2392.37,708.66 J2.5 2802.17,708.66 2845,751.5 2845,854.43 2733.33,966.1 SEL.1

## Polygon pours and split planes (outlines as drawn)
12V on Top Layer "12V_L01_P010" (solid, pour order 10): 0,1181.1 1400,1181.1 1400,685 1575,685 1575,500 885,500 885,675 685,875 535,875 250,590 0,590
NetD1_1 on Top Layer "NETD1_1_L01_P014" (solid, pour order 14): 1410,1181.1 1410,690 1740,690 1740,775 2195,775 2195,1181.1
12V_FUSED on Top Layer "12V_FUSED_L01_P011" (solid, pour order 11): 870,490 1900,490 1900,765 2195,765 2195,0 870,0 870,424.16
GND on Top Layer "GND_L01_P017" (solid, pour order 17): 2210,1180 3145,1180 3145,5 3140,0 2210,0
12V_FUSED on Top Layer "12V_FUSED_L01_P012" (solid, pour order 12): 355,170 680,170 680,315 855,315 855,510 660,510 660,635 555,635 355,435
OUTA on Top Layer "OUTA_L01_P008" (solid, pour order 8): 345,360 345,435 555,645 670,645 670,579.16 670,505 895,505 895,579.16 895,650 680,865 540,865 254.16,579.16 0,579.16 0,360
NetD1_2 on Top Layer "NETD1_2_L01_P013" (solid, pour order 13): 1585,500 1890,500 1890,765 1750,765 1750,685 1585,685
OUTB on Top Layer "OUTB_L01_P007" (solid, pour order 7): 345,350 345,160 540,160 670,160 685,175 685,265 673.78,265 673.78,305 897.32,305 897.32,265 860,265 860,0 0,0 0,350
no net on Top Layer "NONET_L01_P004" (solid, pour order 4): 65,405
12V_FUSED on Bottom Layer "12V_FUSED_L04_P028" (solid, remove dead copper, pour order 28): 935,0 935,155 935,185 865,185 425,185 335,275 335,440 545,650 630,650 630,605 720,515 830,515 830,465 865,430 990,430 1035,475 1850,475 1995,620 2220,620 2220,0
OUTA on Bottom Layer "OUTA_L04_P027" (solid, pour order 27): 0,375 0,580 195,580 515,900 790,900 790,760 700,670 540,670 325,455 325,375
OUTB on Bottom Layer "OUTB_L04_P025" (solid, pour order 25): 920,0 920,175 665,175 420,175 325,270 325,365 0,365 0,0
GND on Bottom Layer "GND_L04_P016" (solid, remove dead copper, pour order 16): 0,590 2.5,592.5 187.5,592.5 505,910 800,910 800,745 715,660 645,660 645,609.31 724.31,530 842.15,530 842.15,467.85 865,445 1050,445 1050,535 1785,535 1950,700 2235,700 2235,0 3150,0 3150,1180 0,1180
no net on Bottom Layer "NONET_L04_P015" (solid, pour order 15): 0,5
12V_FUSED on 12V_FUSED "12V_FUSED_L03_P001" (solid, pour order 1): 865,0 865,230 815,280 645,280 530,165 410,165 355,220 355,490 570,490 570,595 590,615 1370,615 1370,1181.1 3149.61,1181.1 3149.61,0
OUTA on 12V_FUSED "OUTA_L03_P029" (solid, pour order 29): 0,710 350,710 530,890 755,890 755,625 590,625 560,595 560,500 345,500 345,370 0,370
GND on 12V_FUSED "GND_L03_P024" (solid, pour order 24): 0,720 350,720 530,900 765,900 765,625 1359.9,625 1360.09,1180 0,1180
no net on 12V_FUSED "NONET_L03_P023" (solid, pour order 23): 235,85
no net on 12V_FUSED "NONET_L03_P022" (solid, pour order 22): 190,200
OUTB on 12V_FUSED "OUTB_L03_P021" (solid, pour order 21): 855,0 855,220 805,270 650,270 535,155 405,155 345,215 345,360 0,360 0,0
GND on GND "GND_L02_P000" (solid, pour order 0): 0,0 0,1181.1 3149.61,1181.1 3149.61,0

## Silkscreen, mask and mechanical layers (free items; w line width, h text height)
Top Overlay:
  drawing of 7 lines, arcs and shapes, not listed
  text "LOW POWER BRUSHED MOTOR CONTROLLER / APRIL 2020 / CINDY LI" at 1430,1020 h50
Bottom Overlay:
  drawing of 23 lines, arcs and shapes, not listed
  text "GND" at 442.04,845.64 h60
  text "12V" at 417.77,655 h60
  text "OUTA" at 475,455.64 h60
  text "OUTB" at 472.06,255.64 h60